# Altium PCB BBB_Board_NEW_PLANES.PcbDoc (part 4 of 4)
Units mil, origin at the board's own origin, x right, y up, seen from the top; angles counter-clockwise.
Board outline 11000 x 5000 mil, 2 copper layers (Top Layer, Bottom Layer); 103 components, 383 nets, 1066 pads, 514 vias.
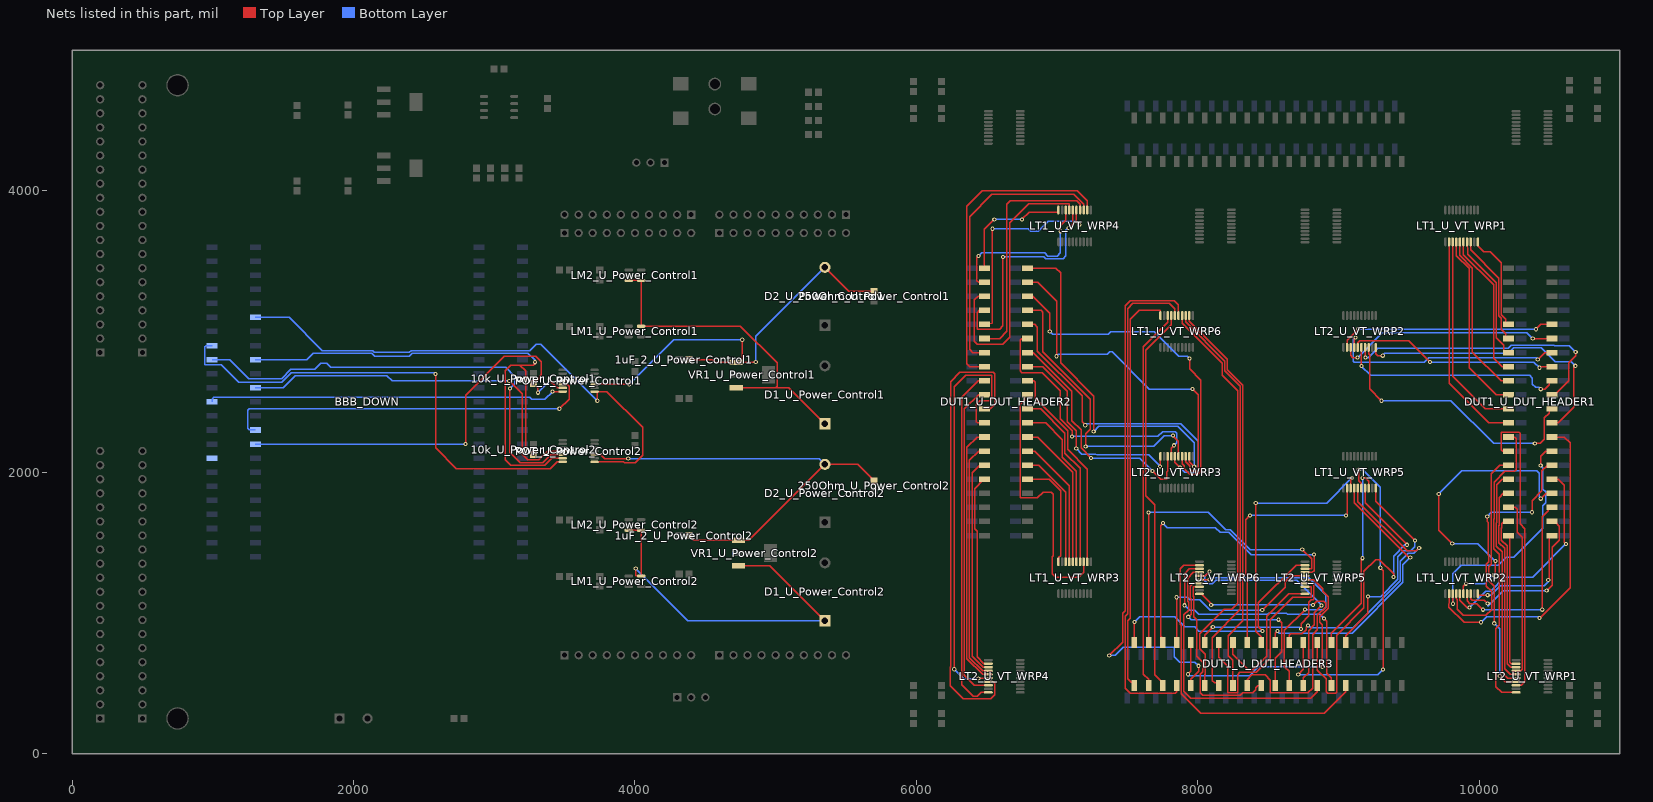
[diagram p4: the nets of this part, all layers, seen from the top]

## Via types
v1: diameter 30, hole 15, Top Layer to Bottom Layer, 514 vias

## Nets (pads, with @x,y where several pads share a name; then routed paths per layer and width w, separated by ;. In a path a pad name is that pad's centre, name@x,y a point inside that pad or via, vN(x,y) a via of type N, cw(c..) or ccw(c..) an arc to the next point about the centre after c; other vN are vias at no path point) (continued)
OVCC_B32: DUT1_U_DUT_HEADER3.1 LT1_U_VT_WRP6.20 | length 2921.8
  Top Layer w10: DUT1_U_DUT_HEADER3.1@7550,483.96 7550,504 7530,504 7503,531 7503,945 7520,962 7520,3087 7585,3152 7734.84,3152 LT1_U_VT_WRP6.20@7734.84,3113.19
OVCC_B33: DUT1_U_DUT_HEADER3.2 LT1_U_VT_WRP6.18 | length 2716.2
  Top Layer w10: DUT1_U_DUT_HEADER3.2@7650,483.96 7650,528 7613,565 7613,2893.06 7786.02,3066.09 LT1_U_VT_WRP6.18@7786.02,3113.19
OVCC_B34: DUT1_U_DUT_HEADER3.3 LT1_U_VT_WRP6.17 | length 2753.3
  Top Layer w10: DUT1_U_DUT_HEADER3.3@7750,483.96 7750,504 7694,560 7694,1768 7631,1831 7631,2867 7811.61,3047.61 LT1_U_VT_WRP6.17@7811.61,3113.19
OVCC_B35: DUT1_U_DUT_HEADER3.4 LT1_U_VT_WRP6.16 | length 3544.5
  Top Layer w10: LT1_U_VT_WRP6.16@7837.2,3113.19 7837.2,3160 7798.2,3199 7538,3199 7502,3163 7502,995 7485,978 7485,466 7521,430 7839,430 7850,441 DUT1_U_DUT_HEADER3.4@7850,483.96
OVCC_B36: DUT1_U_DUT_HEADER3.5 LT1_U_VT_WRP6.15 | length 3927.4
  Top Layer w10: v1(7371,698) 7465,792 7465,998 7484,1017 7484,3183 7520,3219 7833,3219 7862.8,3189.2 LT1_U_VT_WRP6.15@7862.8,3113.19 ; DUT1_U_DUT_HEADER3.5@7950,483.96 7950,529 8005,584 v1(8005,624)
  Bottom Layer w10: v1(7371,698) 7413.12,698 7471.04,755.92 7830,755.92 7834,751.92 7834,687 7870,651 7978,651 v1(8005,624)
OVCC_B37: DUT1_U_DUT_HEADER3.6 LT1_U_VT_WRP6.14 | length 2952.6
  Top Layer w10: LT1_U_VT_WRP6.14@7888.39,3113.19 7888.39,3059 8172.14,2775.25 8172.14,2690.14 8285,2577.27 8285,1070 8240,1025 8187,1025 8015,853 8015,743.99 8052,706.99 8052,563.17 8050,561.17 DUT1_U_DUT_HEADER3.6@8050,483.96
OVCC_B38: DUT1_U_DUT_HEADER3.7 LT1_U_VT_WRP6.13 | length 2910
  Top Layer w10: LT1_U_VT_WRP6.13@7913.98,3113.19 7913.98,3068.42 8193,2789.39 8193,2721 8303,2611 8303,1024.5 8103,824.5 8103,519.5 8120.5,502 8150,502 DUT1_U_DUT_HEADER3.7@8150,483.96
OVCC_B39: DUT1_U_DUT_HEADER3.8 LT1_U_VT_WRP6.12 | length 2844.8
  Top Layer w10: LT1_U_VT_WRP6.12@7939.57,3113.19 7939.57,3073 8211,2801.57 8211,2729 8321,2619 8321,944 8216,839 8216,696 8250,662 DUT1_U_DUT_HEADER3.8@8250,483.96
OVCC_B40: DUT1_U_DUT_HEADER3.9 LT2_U_VT_WRP6.20 | length 2231.3
  Top Layer w10: LT2_U_VT_WRP6.20@8011.81,1134.84 8024.16,1134.84 8095,1064 v1(8095,1057) ; DUT1_U_DUT_HEADER3.9@8350,483.96 8350,526 8383,559 8478,559 8516,521 8516,432.58 8517,431.58 8783,431.58 8816,464.58 8816,846.51 8850,880.51 8850,982 8908,1040 8908,1070 8896,1082 8844,1082 v1(8819,1057)
  Bottom Layer w10: v1(8095,1057) v1(8819,1057)
OVCC_B41: DUT1_U_DUT_HEADER3.10 LT2_U_VT_WRP6.18 | length 1312.3
  Top Layer w10: LT2_U_VT_WRP6.18@8011.81,1186.02 7969,1186.02 7967,1184.02 7967,1118 7970,1115 7970,974 7994,950 7994,691 8034,651 8034,581.17 8016,563.17 8016,432.58 8035,413.58 8300.69,413.58 8318.69,431.58 8389,431.58 8412,454.58 8412,470 8425.96,483.96 DUT1_U_DUT_HEADER3.10@8450,483.96
OVCC_B42: DUT1_U_DUT_HEADER3.11 LT2_U_VT_WRP6.17 | length 1447.8
  Top Layer w10: v1(7932,972) 7952,992 7952,1100 7946.98,1105.02 7946.98,1189.98 7968.61,1211.61 LT2_U_VT_WRP6.17@8011.81,1211.61 ; DUT1_U_DUT_HEADER3.11@8550,483.96 8550,678 8595,723 8595,931 v1(8574,952)
  Bottom Layer w10: v1(7932,972) 7952,952 v1(8574,952)
OVCC_B43: DUT1_U_DUT_HEADER3.12 LT2_U_VT_WRP6.16 | length 1809.1
  Top Layer w10: LT2_U_VT_WRP6.16@8011.81,1237.2 8083.8,1237.2 v1(8084,1237) ; DUT1_U_DUT_HEADER3.12@8650,483.96 8650,585 8616,619 8616,878 v1(8762,1024)
  Bottom Layer w10: v1(8084,1237) 8095.88,1248.88 8790.12,1248.88 8909,1130 8909,1041 8892,1024 v1(8762,1024)
OVCC_B44: DUT1_U_DUT_HEADER3.13 LT2_U_VT_WRP6.15 | length 1709.5
  Top Layer w10: LT2_U_VT_WRP6.15@8011.81,1262.8 8052.8,1262.8 v1(8084,1294) ; DUT1_U_DUT_HEADER3.13@8750,483.96 8750,538 8787,575 8787,873.86 8829.27,916.13 8829.27,1002.27 v1(8880,1053)
  Bottom Layer w10: v1(8084,1294) 8050,1260 8050,1227.5 8069.07,1208.43 8103.93,1208.43 8126.38,1230.88 8702.12,1230.88 v1(8880,1053)
OVCC_B45: DUT1_U_DUT_HEADER3.14 LT2_U_VT_WRP6.14 | length 1952
  Top Layer w10: LT2_U_VT_WRP6.14@8011.81,1288.39 7969.39,1288.39 7928,1247 7928,1082.98 7934,1076.98 7934,1020.32 7901,987.32 7901,443 7949,395 8804,395 8850,441 DUT1_U_DUT_HEADER3.14@8850,483.96
OVCC_B46: DUT1_U_DUT_HEADER3.15 LT2_U_VT_WRP6.13 | length 1882.1
  Top Layer w10: v1(7906,1054) 7906,1280 7939.98,1313.98 LT2_U_VT_WRP6.13@8011.81,1313.98 ; v1(8897,960) 8916,941 8916,573 8950,539 DUT1_U_DUT_HEADER3.15@8950,483.96
  Bottom Layer w10: v1(7906,1054) 7941,1019 7977,1019 8007,989 8493,989 8503,999 8629.5,999 8638.5,990 8867,990 v1(8897,960)
OVCC_B47: DUT1_U_DUT_HEADER3.16 LT2_U_VT_WRP6.12 | length 2368.7
  Top Layer w10: LT2_U_VT_WRP6.12@8011.81,1339.57 7899.94,1339.57 7876,1315.63 7876,919 7883,912 7883,427 8022,288 8898,288 9050,440 DUT1_U_DUT_HEADER3.16@9050,483.96
OVCC_B48: DUT1_U_DUT_HEADER3.25 LT1_U_VT_WRP5.20 | length 1496.2
  Top Layer w10: DUT1_U_DUT_HEADER3.25@9050,791.04 9050,837.59 9209,996.59 v1(9209,1116) ; LT1_U_VT_WRP5.20@9265.16,1886.81 9265.16,1792.78 v1(9542.88,1515.05)
  Bottom Layer w10: v1(9209,1116) 9299,1116 9422,1239 9422,1398.61 9464.39,1441 9513.06,1441 9542.88,1470.82 v1(9542.88,1515.05)
OVCC_B49: DUT1_U_DUT_HEADER3.26 LT1_U_VT_WRP5.18 | length 1361.2
  Top Layer w10: DUT1_U_DUT_HEADER3.26@8950,791.04 8950,855 9162,1067 9162,1380 v1(9171,1389) ; v1(9171,1959) 9191,1959 9213.98,1936.02 LT1_U_VT_WRP5.18@9213.98,1886.81
  Bottom Layer w10: v1(9171,1389) v1(9171,1959)
OVCC_B50: DUT1_U_DUT_HEADER3.27 LT1_U_VT_WRP5.17 | length 2507.6
  Top Layer w10: DUT1_U_DUT_HEADER3.27@8850,791.04 8850,594 8913,531 8913,440 8923,430 8980.54,430 8986,435.46 8986,843 9180,1037 9180,1294.46 9263.32,1377.77 9289.89,1377.77 9391,1276.67 v1(9391,1256) ; LT1_U_VT_WRP5.17@9188.39,1886.81 9188.39,1782.61 v1(9487,1484)
  Bottom Layer w10: v1(9391,1256) 9391,1403.97 9471.03,1484 v1(9487,1484)
OVCC_B51: DUT1_U_DUT_HEADER3.28 LT1_U_VT_WRP5.16 | length 2511.9
  Top Layer w10: v1(8714,562) 8750,598 DUT1_U_DUT_HEADER3.28@8750,791.04 ; v1(9143,2019) 9143,1939.8 9162.8,1920 LT1_U_VT_WRP5.16@9162.8,1886.81 ; v1(9297,1321) 9317,1301 v1(9317,598.65)
  Bottom Layer w10: v1(8714,562) 9280.35,562 v1(9317,598.65) ; v1(9143,2019) 9172,2019 9297,1894 v1(9297,1321)
OVCC_B52: DUT1_U_DUT_HEADER3.29 LT1_U_VT_WRP5.15 | length 2020.1
  Top Layer w10: DUT1_U_DUT_HEADER3.29@8650,791.04 8650,841 8660,851 8740,851 8769,880 8769,897 v1(8783,911) ; LT1_U_VT_WRP5.15@9137.2,1886.81 9137.2,1791.43 9487.14,1441.5 9553,1441.5 v1(9573,1461.5)
  Bottom Layer w10: v1(8783,911) 8801,893 9103,893 9440,1230 9440,1368.03 9494.56,1422.59 9534.09,1422.59 v1(9573,1461.5)
OVCC_B53: DUT1_U_DUT_HEADER3.30 LT1_U_VT_WRP5.14 | length 1994
  Top Layer w10: DUT1_U_DUT_HEADER3.30@8550,791.04 8550,855 v1(8566,871) ; LT1_U_VT_WRP5.14@9111.61,1886.81 9111.61,1783.64 9500.67,1394.59 v1(9509.97,1394.59)
  Bottom Layer w10: v1(8566,871) 8580,857 9095.85,857 9458,1219.15 9458,1342.61 v1(9509.97,1394.59)
OVCC_B54: DUT1_U_DUT_HEADER3.31 LT1_U_VT_WRP5.13 | length 1838.3
  Top Layer w10: v1(8412,1781) 8412,870 8450,832 DUT1_U_DUT_HEADER3.31@8450,791.04 ; LT1_U_VT_WRP5.13@9086.02,1886.81 9086.02,1950.02 v1(9095,1959)
  Bottom Layer w10: v1(8412,1781) 8917,1781 v1(9095,1959)
OVCC_B55: DUT1_U_DUT_HEADER3.32 LT1_U_VT_WRP5.12 | length 1799.2
  Top Layer w10: DUT1_U_DUT_HEADER3.32@8350,791.04 8350,1267.75 8339,1278.75 8339,1662 v1(8370,1693) ; v1(9053,1693) 9060.43,1700.43 LT1_U_VT_WRP5.12@9060.43,1886.81
  Bottom Layer w10: v1(8370,1693) v1(9053,1693)
OVCC_B56: DUT1_U_DUT_HEADER3.33 LT2_U_VT_WRP5.20 | length 1031.3
  Top Layer w10: DUT1_U_DUT_HEADER3.33@8250,791.04 8250,706 8360,596 8392,596 8489,693 8489,975.84 8648,1134.84 LT2_U_VT_WRP5.20@8761.81,1134.84
OVCC_B57: DUT1_U_DUT_HEADER3.34 LT2_U_VT_WRP5.18 | length 1615.3
  Top Layer w10: DUT1_U_DUT_HEADER3.34@8150,791.04 8150,686.31 8213.68,622.63 8213.68,431.58 8282.69,431.58 8283,431.9 8283,560.31 8299.69,577 8413.96,577 8516,679.04 8516,952 8676,1112 8807,1112 8807,1186.02 LT2_U_VT_WRP5.18@8761.81,1186.02
OVCC_B58: DUT1_U_DUT_HEADER3.35 LT2_U_VT_WRP5.17 | length 1195.5
  Top Layer w10: DUT1_U_DUT_HEADER3.35@8050,791.04 8050,842 v1(8107,899) ; v1(8734,886) 8734,922.51 8790,978.51 8790,1077.54 8804.81,1092.35 8825,1092.35 8825,1200 8813.39,1211.61 LT2_U_VT_WRP5.17@8761.81,1211.61
  Bottom Layer w10: v1(8107,899) 8721,899 v1(8734,886)
OVCC_B59: DUT1_U_DUT_HEADER3.36 LT2_U_VT_WRP5.16 | length 1976.5
  Top Layer w10: v1(7930,564) 7950,584 DUT1_U_DUT_HEADER3.36@7950,791.04 ; LT2_U_VT_WRP5.16@8761.81,1237.2 8823.33,1237.2 8888.69,1171.85 8888.69,1154.57 8927,1116.26 8927,1033.54 8868,974.54 8868,933 8885,916 v1(8885,616)
  Bottom Layer w10: v1(7930,564) 7939,555 8368,555 8429,616 v1(8885,616)
OVCC_B60: DUT1_U_DUT_HEADER3.37 LT2_U_VT_WRP5.15 | length 1394.7
  Top Layer w10: v1(7848,1111) 7850,1109 DUT1_U_DUT_HEADER3.37@7850,791.04 ; v1(8458,1020) 8620.76,1182.76 8620.76,1220 8663.56,1262.8 LT2_U_VT_WRP5.15@8761.81,1262.8
  Bottom Layer w10: v1(7848,1111) 7925.46,1111 7942.46,1094 8013,1094 8087,1020 v1(8458,1020)
OVCC_B61: DUT1_U_DUT_HEADER3.38 LT2_U_VT_WRP5.14 | length 2209.4
  Top Layer w10: DUT1_U_DUT_HEADER3.38@7750,791.04 7750,820.27 7735,835.27 7735,1621 v1(7752,1638) ; LT2_U_VT_WRP5.14@8761.81,1288.39 8813.39,1288.39 8826,1301 8826,1414 v1(8825,1415)
  Bottom Layer w10: v1(7752,1638) 7783,1607 8125,1607 8158.98,1573.02 8220.98,1573.02 8379,1415 v1(8825,1415)
OVCC_B62: DUT1_U_DUT_HEADER3.39 LT2_U_VT_WRP5.13 | length 2333.8
  Top Layer w10: DUT1_U_DUT_HEADER3.39@7650,791.04 v1(7650,1714.4) ; v1(8742,1450) 8808,1384 8808,1314.98 8807,1313.98 LT2_U_VT_WRP5.13@8761.81,1313.98
  Bottom Layer w10: v1(7650,1714.4) 8074.91,1714.4 8197.31,1592 8231,1592 8373,1450 v1(8742,1450)
OVCC_B63: DUT1_U_DUT_HEADER3.40 LT2_U_VT_WRP5.12 | length 1766.9
  Top Layer w10: DUT1_U_DUT_HEADER3.40@7550,791.04 v1(7550,935) ; v1(8460,871) 8430,901 8430,1071.46 8698.1,1339.57 LT2_U_VT_WRP5.12@8761.81,1339.57
  Bottom Layer w10: v1(7550,935) 7587,972 7835.98,972 7906.98,901 7977.22,901 8007.22,871 v1(8460,871)
OVCC_B64: DUT1_U_DUT_HEADER2.1 LT1_U_VT_WRP4.20 | length 868.9
  Top Layer w10: DUT1_U_DUT_HEADER2.1@6483.96,3450 6483,3450 6483,3725 v1(6554,3796) ; v1(6750,3796) 6802,3848 7009.84,3848 LT1_U_VT_WRP4.20@7009.84,3863.19
  Bottom Layer w10: v1(6554,3796) v1(6750,3796)
OVCC_B65: DUT1_U_DUT_HEADER2.2 LT1_U_VT_WRP4.18 | length 1166.8
  Top Layer w10: v1(6442,3536) 6430,3524 6430,3361.58 6441.58,3350 DUT1_U_DUT_HEADER2.2@6483.96,3350 ; v1(7024,3713) 7024,3753 7061.02,3790.02 LT1_U_VT_WRP4.18@7061.02,3863.19
  Bottom Layer w10: v1(6442,3536) 6464,3558 6912.94,3558 6934.94,3536 7000,3536 7024,3560 v1(7024,3713)
OVCC_B66: DUT1_U_DUT_HEADER2.3 LT1_U_VT_WRP4.17 | length 1994.3
  Top Layer w10: DUT1_U_DUT_HEADER2.3@6483.96,3250 6439,3250 6413,3224 6413,2929 6434,2908 6613,2908 6665,2960 6665,3773 6800,3908 7086.61,3908 LT1_U_VT_WRP4.17@7086.61,3863.19
OVCC_B67: DUT1_U_DUT_HEADER2.4 LT1_U_VT_WRP4.16 | length 1670.6
  Top Layer w10: DUT1_U_DUT_HEADER2.4@6483.96,3150 6448,3150 6431,3133 6431,3017.58 6432.58,3016 6591,3016 6615,3040 v1(6615,3530) ; v1(7083,3736) 7112.2,3765.2 LT1_U_VT_WRP4.16@7112.2,3863.19
  Bottom Layer w10: v1(6615,3530) 6907,3530 6920,3517 7043,3517 7063,3537 7063,3720 7079,3736 v1(7083,3736)
OVCC_B68: DUT1_U_DUT_HEADER2.5 LT1_U_VT_WRP4.15 | length 1504.8
  Top Layer w10: DUT1_U_DUT_HEADER2.5@6483.96,3050 6541,3060 v1(6541,3730) ; LT1_U_VT_WRP4.15@7137.8,3863.19 7137.8,3779 v1(7157.8,3759)
  Bottom Layer w10: v1(6541,3730) 6794,3730 6813,3711 6867,3711 6939,3783 7133.8,3783 v1(7157.8,3759)
OVCC_B69: DUT1_U_DUT_HEADER2.6 LT1_U_VT_WRP4.14 | length 1664
  Top Layer w10: DUT1_U_DUT_HEADER2.6@6483.96,2950 6593,2950 6643,3000 6643,3904 6667,3928 7138,3928 7163.39,3902.61 LT1_U_VT_WRP4.14@7163.39,3863.19
OVCC_B70: DUT1_U_DUT_HEADER2.7 LT1_U_VT_WRP4.13 | length 2004.7
  Top Layer w10: DUT1_U_DUT_HEADER2.7@6483.96,2850 6402,2850 6379,2873 6379,3817 6537,3975 7118.98,3975 7188.98,3905 LT1_U_VT_WRP4.13@7188.98,3863.19
OVCC_B71: DUT1_U_DUT_HEADER2.8 LT1_U_VT_WRP4.12 | length 2249.3
  Top Layer w10: DUT1_U_DUT_HEADER2.8@6483.96,2750 6380,2750 6359,2771 6359,3891 6468,4000 7143,4000 7214.57,3928.43 LT1_U_VT_WRP4.12@7214.57,3863.19
OVCC_B72: DUT1_U_DUT_HEADER2.9 LT2_U_VT_WRP4.20 | length 2485
  Top Layer w10: DUT1_U_DUT_HEADER2.9@6483.96,2650 6441,2650 6323.58,2532.58 6323.58,488.42 6403,409 6434.16,409 6460,434.84 LT2_U_VT_WRP4.20@6511.81,434.84
OVCC_B73: DUT1_U_DUT_HEADER2.10 LT2_U_VT_WRP4.18 | length 2276.7
  Top Layer w10: DUT1_U_DUT_HEADER2.10@6483.96,2550 6441.58,2550 6341.58,2450 6341.58,556.44 6412,486.02 LT2_U_VT_WRP4.18@6511.81,486.02
OVCC_B74: DUT1_U_DUT_HEADER2.11 LT2_U_VT_WRP4.17 | length 3309.1
  Top Layer w10: DUT1_U_DUT_HEADER2.11@6483.96,2450 6525,2450 6556,2481 6556,2699 6545,2710 6310,2710 6244,2644 6244,616 6241,613 6241,481 6332,390 6528,390 6558,420 6558,500 6546.39,511.61 LT2_U_VT_WRP4.17@6511.81,511.61
OVCC_B75: DUT1_U_DUT_HEADER2.12 LT2_U_VT_WRP4.16 | length 3060.5
  Top Layer w10: v1(6269,600) 6269,2607 6350,2688 6537,2688 6537,2520 6523,2506 6451,2506 6425,2480 6425,2360 6435,2350 DUT1_U_DUT_HEADER2.12@6483.96,2350 ; v1(6440,533) 6444.2,537.2 LT2_U_VT_WRP4.16@6511.81,537.2
  Bottom Layer w10: v1(6269,600) 6336,533 v1(6440,533)
OVCC_B76: DUT1_U_DUT_HEADER2.13 LT2_U_VT_WRP4.15 | length 1856.3
  Top Layer w10: DUT1_U_DUT_HEADER2.13@6483.96,2250 6431,2250 6359.58,2178.58 6359.58,674.96 6471.75,562.8 LT2_U_VT_WRP4.15@6511.81,562.8
OVCC_B77: DUT1_U_DUT_HEADER2.14 LT2_U_VT_WRP4.14 | length 1709.6
  Top Layer w10: DUT1_U_DUT_HEADER2.14@6483.96,2150 6441.58,2150 6377.58,2086 6377.58,682.42 6471.61,588.39 LT2_U_VT_WRP4.14@6511.81,588.39
OVCC_B78: DUT1_U_DUT_HEADER2.15 LT2_U_VT_WRP4.13 | length 1562.5
  Top Layer w10: DUT1_U_DUT_HEADER2.15@6483.96,2050 6449.58,2050 6395.58,1996 6395.58,693.42 6475.02,613.98 LT2_U_VT_WRP4.13@6511.81,613.98
OVCC_B79: DUT1_U_DUT_HEADER2.16 LT2_U_VT_WRP4.12 | length 1401.6
  Top Layer w10: DUT1_U_DUT_HEADER2.16@6483.96,1950 6480,1950 6413.58,1883.58 6413.58,1599.31 6431,1581.9 6431,688 6479.43,639.57 LT2_U_VT_WRP4.12@6511.81,639.57
OVCC_B80: DUT1_U_DUT_HEADER2.25 LT1_U_VT_WRP3.20 | length 778.9
  Top Layer w10: DUT1_U_DUT_HEADER2.25@6791.04,1950 6942.9,1950 7025,1867.9 7025,1406.31 7013.58,1394.88 7013.58,1366.92 LT1_U_VT_WRP3.20@7009.84,1363.19
OVCC_B81: DUT1_U_DUT_HEADER2.26 LT1_U_VT_WRP3.18 | length 844.3
  Top Layer w10: DUT1_U_DUT_HEADER2.26@6791.04,2050 6869,2050 7061.02,1857.98 LT1_U_VT_WRP3.18@7061.02,1363.19
OVCC_B82: DUT1_U_DUT_HEADER2.27 LT1_U_VT_WRP3.17 | length 937.9
  Top Layer w10: DUT1_U_DUT_HEADER2.27@6791.04,2150 6840,2150 7086.61,1903.39 LT1_U_VT_WRP3.17@7086.61,1363.19
OVCC_B83: DUT1_U_DUT_HEADER2.28 LT1_U_VT_WRP3.16 | length 1062
  Top Layer w10: DUT1_U_DUT_HEADER2.28@6791.04,2250 6863,2250 7112.2,2000.8 LT1_U_VT_WRP3.16@7112.2,1363.19
OVCC_B84: DUT1_U_DUT_HEADER2.29 LT1_U_VT_WRP3.15 | length 1204.8
  Top Layer w10: DUT1_U_DUT_HEADER2.29@6791.04,2350 6918,2350 7037,2231 7037,2106.54 7137.8,2005.75 LT1_U_VT_WRP3.15@7137.8,1363.19
OVCC_B85: DUT1_U_DUT_HEADER2.30 LT1_U_VT_WRP3.14 | length 1295.5
  Top Layer w10: DUT1_U_DUT_HEADER2.30@6791.04,2450 6884,2450 7055.77,2278.23 7055.77,2136.2 7163.39,2028.59 LT1_U_VT_WRP3.14@7163.39,1363.19
OVCC_B86: DUT1_U_DUT_HEADER2.31 LT1_U_VT_WRP3.13 | length 1911.8
  Top Layer w10: DUT1_U_DUT_HEADER2.31@6791.04,2550 6771,2550 6771,2515.33 6738,2482.33 6738,1817.99 6738.99,1817 6860,1817 6900,1857 6959,1857 6974,1842 6974,1406.35 6967,1399.35 6967,1278 6991,1254 7152.98,1254 7188.98,1290 LT1_U_VT_WRP3.13@7188.98,1363.19
OVCC_B87: DUT1_U_DUT_HEADER2.32 LT1_U_VT_WRP3.12 | length 1487.4
  Top Layer w10: DUT1_U_DUT_HEADER2.32@6791.04,2650 6834,2650 6843.42,2640.58 6843.42,2526.58 7075,2295 7075,2161.44 7214.57,2021.87 LT1_U_VT_WRP3.12@7214.57,1363.19
OVCC_B88: DUT1_U_DUT_HEADER2.33 LT2_U_VT_WRP3.20 | length 1509
  Top Layer w10: DUT1_U_DUT_HEADER2.33@6791.04,2750 6898.2,2750 7072.96,2575.24 7072.96,2359.35 7136,2296.31 v1(7136,2169) ; v1(7732,2041) 7734.84,2043.84 LT2_U_VT_WRP3.20@7734.84,2113.19
  Bottom Layer w10: v1(7136,2169) 7176,2129 7274.59,2129 7280.59,2123 7650,2123 v1(7732,2041)
OVCC_B89: DUT1_U_DUT_HEADER2.34 LT2_U_VT_WRP3.18 | length 1724.6
  Top Layer w10: DUT1_U_DUT_HEADER2.34@6791.04,2850 6832,2850 7106,2576 7106,2367 7170,2303 7170,2172 v1(7242,2100) ; v1(7677,2009) 7735,1951 7779,1951 7780,1952 7780,2001.98 7786.02,2008 LT2_U_VT_WRP3.18@7786.02,2113.19
  Bottom Layer w10: v1(7242,2100) 7586,2100 v1(7677,2009)
OVCC_B90: DUT1_U_DUT_HEADER2.35 LT2_U_VT_WRP3.17 | length 1924.1
  Top Layer w10: DUT1_U_DUT_HEADER2.35@6791.04,2950 6748.67,2950 6738,2939.33 6738,2719.33 6750,2707.33 6894.67,2707.33 7022,2580 7022,2379 7107,2294 v1(7107,2254) ; LT2_U_VT_WRP3.17@7811.61,2113.19 7811.61,2171.61 v1(7831,2191)
  Bottom Layer w10: v1(7107,2254) 7716,2254 7751,2289 7839.2,2289 7851,2277.2 7851,2211 v1(7831,2191)
OVCC_B91: DUT1_U_DUT_HEADER2.36 LT2_U_VT_WRP3.16 | length 2219
  Top Layer w10: DUT1_U_DUT_HEADER2.36@6791.04,3050 6840,3050 6860,3030 6860,2860 7177.24,2542.76 7177.24,2356.76 v1(7200,2334) ; LT2_U_VT_WRP3.16@7837.2,2113.19 7837.2,2070.04 v1(7873.2,2034.04)
  Bottom Layer w10: v1(7200,2334) 7210,2344 7878.85,2344 8003,2219.85 8003,2021 7981,1999 7908.24,1999 v1(7873.2,2034.04)
OVCC_B92: DUT1_U_DUT_HEADER2.37 LT2_U_VT_WRP3.15 | length 2034.9
  Top Layer w10: DUT1_U_DUT_HEADER2.37@6791.04,3150 6886.1,3150 6899,3137.1 6899,2855 7235,2519 7235,2306 7203,2274 v1(7203,2183) ; v1(7822.8,2260) 7862.8,2220 LT2_U_VT_WRP3.15@7862.8,2113.19
  Bottom Layer w10: v1(7203,2183) 7685.8,2183 7762.8,2260 v1(7822.8,2260)
OVCC_B93: DUT1_U_DUT_HEADER2.38 LT2_U_VT_WRP3.14 | length 2498.5
  Top Layer w10: DUT1_U_DUT_HEADER2.38@6791.04,3250 6827,3250 6948,3129 v1(6948,2999) ; LT2_U_VT_WRP3.14@7888.39,2113.19 7888.39,2060.82 7903.2,2046 7903.2,2025.18 7944.39,1984 8000,1984 8021,2005 8021,2654 7941,2734 v1(7941,2807.57)
  Bottom Layer w10: v1(6948,2999) 6968,2979 7363,2979 7382,2998 7689,2998 7863,2824 7924.57,2824 v1(7941,2807.57)
OVCC_B94: DUT1_U_DUT_HEADER2.39 LT2_U_VT_WRP3.13 | length 2502.3
  Top Layer w10: DUT1_U_DUT_HEADER2.39@6791.04,3350 6861,3350 6996,3215 v1(6996,2824) ; LT2_U_VT_WRP3.13@7913.98,2113.19 7913.98,2073.67 7942.07,2045.57 7942.07,2024.93 7960,2007 7990,2007 8002,2019 8002,2552 v1(7963,2591)
  Bottom Layer w10: v1(6996,2824) 7010,2838 7358,2838 7376,2856 7391.12,2856 7656.12,2591 v1(7963,2591)
OVCC_B95: DUT1_U_DUT_HEADER2.40 LT2_U_VT_WRP3.12 | length 2508.7
  Top Layer w10: DUT1_U_DUT_HEADER2.40@6791.04,3450 6992,3450 7025,3417 7025,2776 7260,2541 v1(7260,2288.49) ; LT2_U_VT_WRP3.12@7939.57,2113.19 7939.57,2074.43 v1(7974,2040)
  Bottom Layer w10: v1(7260,2288.49) 7297.51,2326 7858.33,2326 7974,2210.33 v1(7974,2040)
OVCC_B96: DUT1_U_DUT_HEADER1.1 LT1_U_VT_WRP2.20 | length 900.4
  Top Layer w10: LT1_U_VT_WRP2.20@9990.16,1136.81 9990.16,1126 v1(10060,1126) ; v1(10490,1234) 10497,1241 10497,1550 DUT1_U_DUT_HEADER1.1@10516.04,1550
  Bottom Layer w10: v1(10060,1126) 10080,1126 10148,1194 10462,1194 10490,1222 v1(10490,1234)
OVCC_B97: DUT1_U_DUT_HEADER1.2 LT1_U_VT_WRP2.18 | length 1217.7
  Top Layer w10: LT1_U_VT_WRP2.18@9938.98,1136.81 9938.98,1101.1 9950,1090.07 10036.93,1090.07 v1(10060,1067) ; v1(10479,1159) 10518,1198 10518,1466.9 10568.42,1517.31 10568.42,1617.58 10536,1650 DUT1_U_DUT_HEADER1.2@10516.04,1650
  Bottom Layer w10: v1(10060,1067) 10060,1047 10172,1159 v1(10479,1159)
OVCC_B98: DUT1_U_DUT_HEADER1.3 LT1_U_VT_WRP2.17 | length 1381.4
  Top Layer w10: LT1_U_VT_WRP2.17@9913.39,1136.81 9913.39,1086 9933.39,1066 9983,1066 v1(10026,1023) ; v1(10448,1023) 10448,1683 10491,1726 10491,1750 DUT1_U_DUT_HEADER1.3@10516.04,1750
  Bottom Layer w10: v1(10026,1023) v1(10448,1023)
OVCC_B99: DUT1_U_DUT_HEADER1.4 LT1_U_VT_WRP2.16 | length 2223.8
  Top Layer w10: v1(9712,1846) 9712,1589 v1(9808,1493) ; LT1_U_VT_WRP2.16@9887.8,1136.81 9887.8,1189.8 v1(9906,1208) ; v1(10102,1270) 10115,1283 v1(10115,1368) ; v1(10437,1812) 10475,1850 DUT1_U_DUT_HEADER1.4@10516.04,1850
  Bottom Layer w10: v1(9712,1846) 9875,2009 10410,2009 10425,1994 10425,1824 v1(10437,1812) ; v1(9808,1493) 9990,1493 v1(10115,1368) ; v1(9906,1208) 10040,1208 v1(10102,1270)
OVCC_B100: DUT1_U_DUT_HEADER1.5 LT1_U_VT_WRP2.15 | length 1536.1
  Top Layer w10: LT1_U_VT_WRP2.15@9862.2,1136.81 9862.2,1090.8 9915,1038 v1(9930,1038) ; DUT1_U_DUT_HEADER1.5@10516.04,1950 10560,1950 10604.42,1905.58 10604.42,1501.58 v1(10616,1490)
  Bottom Layer w10: v1(9930,1038) 10047,1155 10080.53,1155 10178.88,1253.35 10379.35,1253.35 v1(10616,1490)
OVCC_B101: DUT1_U_DUT_HEADER1.6 LT1_U_VT_WRP2.14 | length 1825.5
  Top Layer w10: LT1_U_VT_WRP2.14@9836.61,1136.81 9836.61,1102.27 9842,1096.88 9842,1025.62 9885.62,982 10047,982 10088,1023 10088,1154 10051,1191 10051,1345.23 10069,1363.23 10069,1405 10063,1411 10063,1643 10057,1649 v1(10057,1685) ; v1(10375,1715) 10375,1797 10445,1867 10445,2008.62 10486.38,2050 DUT1_U_DUT_HEADER1.6@10516.04,2050
  Bottom Layer w10: v1(10057,1685) 10087,1715 v1(10375,1715)
OVCC_B102: DUT1_U_DUT_HEADER1.7 LT1_U_VT_WRP2.13 | length 1691.4
  Top Layer w10: LT1_U_VT_WRP2.13@9811.02,1136.81 9811.02,1066.98 v1(9813,1065) ; v1(10436.5,2047.5) 10436.5,2113.5 10473,2150 DUT1_U_DUT_HEADER1.7@10516.04,2150
  Bottom Layer w10: v1(9813,1065) 9813,1280 9872,1339 10135.49,1339 10191.37,1394.87 10246.87,1394.87 10452,1600 10452,1763.31 10473.32,1784.63 10473.32,1859.67 10452.87,1880.12 10452.87,2031.13 v1(10436.5,2047.5)
OVCC_B103: DUT1_U_DUT_HEADER1.8 LT1_U_VT_WRP2.12 | length 2287.9
  Top Layer w10: LT1_U_VT_WRP2.12@9785.43,1136.81 9785.43,1093.32 9784,1041.67 9891.67,934 v1(10013,934) ; v1(10429,963) 10645,1179 10645,2210 10605,2250 DUT1_U_DUT_HEADER1.8@10516.04,2250
  Bottom Layer w10: v1(10013,934) 10053,974 10418,974 v1(10429,963)
OVCC_B104: DUT1_U_DUT_HEADER1.9 LT2_U_VT_WRP2.20 | length 2045.7
  Top Layer w10: LT2_U_VT_WRP2.20@9265.16,2886.81 9265.16,2840 9277.16,2828 v1(9314,2828) ; DUT1_U_DUT_HEADER1.9@10516.04,2350 10560,2350 10673,2463 10673,2746 v1(10683,2756)
  Bottom Layer w10: v1(9314,2828) 9330,2844 10205.4,2844 10244.08,2882.69 10441.31,2882.69 10540,2784 10655,2784 v1(10683,2756)
OVCC_B105: DUT1_U_DUT_HEADER1.10 LT2_U_VT_WRP2.18 | length 1962.7
  Top Layer w10: LT2_U_VT_WRP2.18@9213.98,2886.81 9213.98,2840 9221,2832.98 9221,2591.57 v1(9304.57,2508) ; v1(10395,2204) 10432.77,2204 10463,2234.23 10463,2385.33 10496,2418.33 10496,2450 DUT1_U_DUT_HEADER1.10@10516.04,2450
  Bottom Layer w10: v1(9304.57,2508) 9798,2508 10102,2204 v1(10395,2204)
OVCC_B106: DUT1_U_DUT_HEADER1.11 LT2_U_VT_WRP2.17 | length 2007.6
  Top Layer w10: LT2_U_VT_WRP2.17@9188.39,2886.81 9188.39,2817.61 v1(9191,2815) ; DUT1_U_DUT_HEADER1.11@10516.04,2550 10536,2550 10636,2650 10636,2779.22 10685.22,2828.45 v1(10685.22,2853.78)
  Bottom Layer w10: v1(9191,2815) 9211,2815 9278,2882 10207.4,2882 10226.08,2900.69 10531.8,2900.69 10533.49,2899 10640,2899 v1(10685.22,2853.78)
OVCC_B107: DUT1_U_DUT_HEADER1.12 LT2_U_VT_WRP2.16 | length 1621.4
  Top Layer w10: LT2_U_VT_WRP2.16@9162.8,2886.81 9163,2851.34 v1(9163,2754) ; v1(10437,2590) 10466,2590 10496,2620 10496,2650 DUT1_U_DUT_HEADER1.12@10516.04,2650
  Bottom Layer w10: v1(9163,2754) 9229,2688 10359,2688 10378,2669 10378,2626 10401,2603 10424,2603 v1(10437,2590)
OVCC_B108: DUT1_U_DUT_HEADER1.13 LT2_U_VT_WRP2.15 | length 1499.8
  Top Layer w10: LT2_U_VT_WRP2.15@9137.2,2886.81 9137.2,2920 9150.2,2933 9500,2933 v1(9650.31,2782.69) ; v1(10429,2742) 10437,2750 DUT1_U_DUT_HEADER1.13@10516.04,2750
  Bottom Layer w10: v1(9650.31,2782.69) 10388.31,2782.69 v1(10429,2742)
OVCC_B109: DUT1_U_DUT_HEADER1.14 LT2_U_VT_WRP2.14 | length 1702.3
  Top Layer w10: LT2_U_VT_WRP2.14@9111.61,2886.81 9111.61,2948.61 v1(9121,2958) ; v1(10415.69,2800.69) 10465,2850 DUT1_U_DUT_HEADER1.14@10516.04,2850
  Bottom Layer w10: v1(9121,2958) 9106,2943 9106,2787.8 9111.8,2782 9609,2782 9640,2813 10403.37,2813 v1(10415.69,2800.69)
OVCC_B110: DUT1_U_DUT_HEADER1.15 LT2_U_VT_WRP2.13 | length 1582.9
  Top Layer w10: LT2_U_VT_WRP2.13@9086.02,2886.81 9086.02,2829.98 9101,2815 v1(9135,2815) ; v1(10380,2950) DUT1_U_DUT_HEADER1.15@10516.04,2950
  Bottom Layer w10: v1(9135,2815) 9311,2991 10339,2991 v1(10380,2950)
OVCC_B111: DUT1_U_DUT_HEADER1.16 LT2_U_VT_WRP2.12 | length 1552.9
  Top Layer w10: LT2_U_VT_WRP2.12@9060.43,2886.81 9060.43,2937.43 v1(9139,3016) ; v1(10403,3016) 10437,3050 DUT1_U_DUT_HEADER1.16@10516.04,3050
  Bottom Layer w10: v1(9139,3016) v1(10403,3016)
OVCC_B112: DUT1_U_DUT_HEADER1.25 LT1_U_VT_WRP1.20 | length 715.7
  Top Layer w10: LT1_U_VT_WRP1.20@9990.16,3636.81 9990.16,3610.31 10032.3,3568.17 10077.67,3568.17 10156.58,3489.26 10156.58,3120.42 10189,3088 10189,3050 DUT1_U_DUT_HEADER1.25@10208.96,3050
OVCC_B113: DUT1_U_DUT_HEADER1.26 LT1_U_VT_WRP1.18 | length 810.3
  Top Layer w10: LT1_U_VT_WRP1.18@9938.98,3636.81 9938.98,3579.61 10138.58,3380 10138.58,3112.96 10156.58,3094.96 10156.58,3017.31 10189,2984.9 10189,2950 DUT1_U_DUT_HEADER1.26@10208.96,2950
OVCC_B114: DUT1_U_DUT_HEADER1.27 LT1_U_VT_WRP1.17 | length 929.1
  Top Layer w10: LT1_U_VT_WRP1.17@9913.39,3636.81 9913.39,3601.99 9920,3595.38 9920,3548.6 10120.58,3348.02 10120.58,2956.42 10175,2902 10175,2850 DUT1_U_DUT_HEADER1.27@10208.96,2850
OVCC_B115: DUT1_U_DUT_HEADER1.28 LT1_U_VT_WRP1.16 | length 1047.3
  Top Layer w10: LT1_U_VT_WRP1.16@9887.8,3636.81 9887.8,3544.75 10102,3330.55 10102,2810 10162,2750 DUT1_U_DUT_HEADER1.28@10208.96,2750
OVCC_B116: DUT1_U_DUT_HEADER1.29 LT1_U_VT_WRP1.15 | length 1162
  Top Layer w10: LT1_U_VT_WRP1.15@9862.2,3636.81 9862.2,3540.86 9952,3451.07 9952,2853 10155,2650 DUT1_U_DUT_HEADER1.29@10208.96,2650
OVCC_B117: DUT1_U_DUT_HEADER1.30 LT1_U_VT_WRP1.14 | length 1293.2
  Top Layer w10: LT1_U_VT_WRP1.14@9836.61,3636.81 9836.61,3539.16 9928.08,3447.7 9928.08,2741.92 10120,2550 DUT1_U_DUT_HEADER1.30@10208.96,2550
OVCC_B118: DUT1_U_DUT_HEADER1.31 LT1_U_VT_WRP1.13 | length 1448.9
  Top Layer w10: LT1_U_VT_WRP1.13@9811.02,3636.81 9811.02,2681.98 10043,2450 DUT1_U_DUT_HEADER1.31@10208.96,2450
OVCC_B119: DUT1_U_DUT_HEADER1.32 LT1_U_VT_WRP1.12 | length 1545.4
  Top Layer w10: LT1_U_VT_WRP1.12@9785.43,3636.81 9785.43,2631.57 10067,2350 DUT1_U_DUT_HEADER1.32@10208.96,2350
OVCC_B120: DUT1_U_DUT_HEADER1.33 LT2_U_VT_WRP1.20 | length 2115.3
  Top Layer w10: DUT1_U_DUT_HEADER1.33@10208.96,2250 10252,2250 10263,2239 10263,2019 10250,2006 10182,2006 10105,1929 10105,1669 10102.58,1666.58 10102.58,1456.42 10143,1416 10143,911.9 10118,886.9 10118,476.84 10160,434.84 LT2_U_VT_WRP1.20@10261.81,434.84
OVCC_B121: DUT1_U_DUT_HEADER1.34 LT2_U_VT_WRP1.18 | length 2171.1
  Top Layer w10: DUT1_U_DUT_HEADER1.34@10208.96,2150 10166,2150 10155,2161 10155,2282 10157,2284 10281,2284 10290,2275 10290,1632 10325,1597 10325,511.02 10300,486.02 LT2_U_VT_WRP1.18@10261.81,486.02
OVCC_B122: DUT1_U_DUT_HEADER1.35 LT2_U_VT_WRP1.17 | length 1759.2
  Top Layer w10: v1(10107,926) 10107,1190 10069.31,1227.69 10069.31,1327.54 10087,1345.23 10087,1428 10084,1431 10084,1674.42 10087,1677.42 10087,1990 10147,2050 DUT1_U_DUT_HEADER1.35@10208.96,2050 ; v1(10146,551.61) 10186,511.61 LT2_U_VT_WRP1.17@10261.81,511.61
  Bottom Layer w10: v1(10107,926) 10146,887 v1(10146,551.61)
OVCC_B123: DUT1_U_DUT_HEADER1.36 LT2_U_VT_WRP1.16 | length 1569
  Top Layer w10: DUT1_U_DUT_HEADER1.36@10208.96,1950 10163,1950 10123,1910 10123,1641.42 10120.58,1639 10120.58,1474.42 10162,1433 10162,578.61 10203.41,537.2 LT2_U_VT_WRP1.16@10261.81,537.2
OVCC_B124: DUT1_U_DUT_HEADER1.37 LT2_U_VT_WRP1.15 | length 1413.5
  Top Layer w10: DUT1_U_DUT_HEADER1.37@10208.96,1850 10172,1850 10141,1819 10141,1623 10138.58,1620.58 10138.58,1499.31 10180,1457.9 10180,602.8 10220,562.8 LT2_U_VT_WRP1.15@10261.81,562.8
OVCC_B125: DUT1_U_DUT_HEADER1.38 LT2_U_VT_WRP1.14 | length 1267.6
  Top Layer w10: DUT1_U_DUT_HEADER1.38@10208.96,1750 10255,1750 10268.98,1736.02 10268.98,1575.02 10307,1537 10307,600 10295.39,588.39 LT2_U_VT_WRP1.14@10261.81,588.39
OVCC_B126: DUT1_U_DUT_HEADER1.39 LT2_U_VT_WRP1.13 | length 1142.2
  Top Layer w10: DUT1_U_DUT_HEADER1.39@10208.96,1650 10177,1650 10160,1633 10160,1606 10156.58,1602.58 10156.58,1517.31 10198,1475.9 10198,640 10224.02,613.98 LT2_U_VT_WRP1.13@10261.81,613.98
OVCC_B127: DUT1_U_DUT_HEADER1.40 LT2_U_VT_WRP1.12 | length 957.2
  Top Layer w10: DUT1_U_DUT_HEADER1.40@10208.96,1550 10217,1550 10217,650 10227.43,639.57 LT2_U_VT_WRP1.12@10261.81,639.57
POS7V_U_Power_Control1: D1_U_Power_Control1.2 LM1_U_Power_Control1.5 LM2_U_Power_Control1.3 LM2_U_Power_Control1.4 VR1_U_Power_Control1.3 | length 2403.6
  Top Layer w10: LM2_U_Power_Control1.3@3955.71,3362.6 LM2_U_Power_Control1.4@4044.29,3362.6 LM1_U_Power_Control1.5@4044.29,3037.4 4749.6,3037.4 5011,2776 5011,2612.45 5000,2601.45 ; VR1_U_Power_Control1.3@4720.83,2601.45 5000,2601.45 ; D1_U_Power_Control1.2@5350,2344.09 5092.65,2601.45 5000,2601.45
POS7V_U_Power_Control2: D1_U_Power_Control2.2 LM1_U_Power_Control2.5 LM2_U_Power_Control2.3 LM2_U_Power_Control2.4 VR1_U_Power_Control2.3 | length 2778.2
  Top Layer w10: LM2_U_Power_Control2.3@3955.71,1587.6 LM2_U_Power_Control2.4@4044.29,1587.6 LM1_U_Power_Control2.5@4044.29,1262.4 4006,1262.4 v1(4006,1315) ; VR1_U_Power_Control2.3@4735.83,1334.45 4959.65,1334.45 D1_U_Power_Control2.2@5350,944.09
  Bottom Layer w10: v1(4006,1315) 4376.91,944.09 D1_U_Power_Control2.2@5350,944.09
RDY0: BBB_DOWN.15 POT_U_Power_Control2.14 | length 3415.9
  Top Layer w10: v1(2583,2697) 2583,2173 2732,2024 3398.77,2024 3448,2073.23 POT_U_Power_Control2.14@3486.81,2073.23
  Bottom Layer w10: BBB_DOWN.15@995.83,2900 953,2900 943,2890 943,2763 1059,2763 1183,2639 1492,2639 1558,2705 2575,2705 v1(2583,2697)
RDY1: BBB_DOWN.23 POT_U_Power_Control1.14 | length 2547.1
  Top Layer w10: v1(3415,2573.23) POT_U_Power_Control1.14@3486.81,2573.23
  Bottom Layer w10: BBB_DOWN.23@995.83,2500 995,2500 995,2520 1008,2533 3251,2533 3266,2518 3359.77,2518 v1(3415,2573.23)
SCLK_W_U_Power_Control1: POT_U_Power_Control1.11
SCLK_W_U_Power_Control2: BBB_DOWN.22 POT_U_Power_Control2.11 | length 2745.9
  Top Layer w10: v1(3107,2649) 3200,2556 3200,2127 3240,2087 3318,2087 3381,2150 POT_U_Power_Control2.11@3486.81,2150
  Bottom Layer w10: BBB_DOWN.22@1302.91,2600 1501,2600 1588,2687 2237,2687 2275,2649 v1(3107,2649)
SDO_W_U_Power_Control1: 10k_U_Power_Control1.1 BBB_DOWN.30 POT_U_Power_Control1.13 | length 3008.5
  Top Layer w10: v1(2797,2200) 2797,2548 3072,2823 3294.6,2823 3333,2784.6 3333,2691.51 3325,2683.51 3325,2675 10k_U_Power_Control1.1@3280,2630 3311,2599 v1(3311,2565) ; v1(3389,2657) 3447.18,2598.82 POT_U_Power_Control1.13@3486.81,2598.82
  Bottom Layer w10: BBB_DOWN.30@1302.91,2200 v1(2797,2200) ; v1(3311,2565) 3389,2643 v1(3389,2657)
SDO_W_U_Power_Control2: 10k_U_Power_Control2.1 BBB_DOWN.18 POT_U_Power_Control2.13 | length 4056.5
  Top Layer w10: 10k_U_Power_Control2.1@3280,2125 3223,2182 3223,2720 3182,2761 ; v1(3290,2782) 3290,2780 3294,2776 3279,2761 3182,2761 ; POT_U_Power_Control2.13@3486.81,2098.82 3408.04,2098.82 3359.22,2050 3117,2050 3078,2089 3078,2720 3119,2761 3182,2761
  Bottom Layer w10: BBB_DOWN.18@1302.91,2800 1669.43,2800 1714.43,2845 2129.95,2845 2150.95,2824 2396.05,2824 2417.05,2845 3240,2845 3290,2795 v1(3290,2782)
SPI1CLK: BBB_DOWN.31
SPICS0: BBB_DOWN.17 POT_U_Power_Control2.12 | length 3274.5
  Top Layer w10: v1(3112,2594) 3112,2140 3184,2068 3345,2068 3401.41,2124.41 POT_U_Power_Control2.12@3486.81,2124.41
  Bottom Layer w10: BBB_DOWN.17@995.83,2800 1120,2800 1256,2664 1489,2664 1555,2730 1725,2730 1769,2774 1811,2774 1840,2745 3082,2745 3147,2680 3147,2629 v1(3112,2594)
SPICS1: BBB_DOWN.28 POT_U_Power_Control1.12 | length 2646.2
  Top Layer w10: v1(3463,2451) 3532,2520 3532,2612.41 3520,2624.41 POT_U_Power_Control1.12@3486.81,2624.41
  Bottom Layer w10: BBB_DOWN.28@1302.91,2300 1260,2300 1249,2311 1249,2440 1260,2451 v1(3463,2451)
V_RST: BBB_DOWN.12 POT_U_Power_Control1.1 POT_U_Power_Control2.1 | length 3802.4
  Top Layer w10: POT_U_Power_Control2.1@3713.19,2073.23 3919.99,2073.23 3925.22,2068 4004,2068 4056,2120 4056,2318 3800.77,2573.23 POT_U_Power_Control1.1@3733,2573.23 ; POT_U_Power_Control1.1@3713.19,2573.23 POT_U_Power_Control1.1@3733,2573.23 ; v1(3733,2508) POT_U_Power_Control1.1@3733,2573.23
  Bottom Layer w10: BBB_DOWN.12@1302.91,3100 1542,3100 1778,2864 2136.4,2864 2149.4,2851 2397.6,2851 2410.6,2864 3253,2864 3299,2910 3331,2910 v1(3733,2508)
VR_ADJ_U_Power_Control1: 1uF_2_U_Power_Control1.2 250Ohm_U_Power_Control1.1 D2_U_Power_Control1.1 POT_U_Power_Control1.3 VR1_U_Power_Control1.1 | length 3118.1
  Top Layer w10: POT_U_Power_Control1.3@3713.19,2624.41 v1(3960.41,2624.41) ; 1uF_2_U_Power_Control1.2@4385,2800 4553,2800 4570.45,2782.55 VR1_U_Power_Control1.1@4720.83,2782.55 VR1_U_Power_Control1.1@4763,2782.55 ; v1(4763,2941) VR1_U_Power_Control1.1@4763,2782.55 ; v1(4859,2782.55) VR1_U_Power_Control1.1@4763,2782.55 ; D2_U_Power_Control1.1@5350,3455.91 5520.91,3285 250Ohm_U_Power_Control1.1@5700,3285
  Bottom Layer w10: v1(3960.41,2624.41) 4277,2941 v1(4763,2941) ; v1(4859,2782.55) 4859,2964.91 D2_U_Power_Control1.1@5350,3455.91
VR_ADJ_U_Power_Control2: 1uF_2_U_Power_Control2.2 250Ohm_U_Power_Control2.1 D2_U_Power_Control2.1 POT_U_Power_Control2.3 VR1_U_Power_Control2.1 | length 3266.7
  Top Layer w10: POT_U_Power_Control2.3@3713.19,2124.41 3757,2124.41 3784.41,2097 v1(3953,2097) ; 1uF_2_U_Power_Control2.2@4385,1550 4419.45,1515.55 VR1_U_Power_Control2.1@4735.83,1515.55 4809.65,1515.55 D2_U_Power_Control2.1@5350,2055.91 5583.09,2055.91 250Ohm_U_Power_Control2.1@5700,1939
  Bottom Layer w10: v1(3953,2097) 5308.91,2097 D2_U_Power_Control2.1@5350,2055.91
pads on no net: 5V_INVERTER.1 5V_INVERTER.7 12V.H POT_U_Power_Control1.5 POT_U_Power_Control2.5

## Polygon pours and split planes (outlines as drawn)
GND on Bottom Layer "Bottom Layer - GND" (solid, remove dead copper, pour order 0): 0,0 0,5000 11000,5000 11000,0
3V3_W_U_Power_Control1 on Top Layer "Top Layer - 3V3" (solid, remove dead copper, pour order 2): 0,0 0,5000 11000,5000 11000,0

## Silkscreen, mask and mechanical layers (free items; w line width, h text height)
Top Overlay:
  lines w10: 4007,4274 4007,4324 4108,4324 4108,4275 ; 4110,4127 4110,4078 4211,4078 4211,4128 ; 4299,474 4299,524 4400,524 4400,475 ; 4402,327 4402,278 4503,278 4503,328
  text "0.1 uF | 0603" at 10450,4875 h100
  text "150uF" at 3130,4840 h60
  text "THIS SIDE NEAR NUMATO USB PORT" at 7588,4796 h60
  text "10uF" at 5366,4675 h60
  text "10uF" at 1505,4665 h60
  text "100nF" at 1850,4665 h60
  text "150uF" at 3435,4595 h60
  text "0.1uF" at 5366,4575 h60
  text "10uF" at 5366,4475 h60
  text "0.1uF" at 5366,4375 h60
  text "0.1 uF | 0603" at 5790,4338.98 h100
  text "5V" at 4141,4277 h60
  text "10uF" at 1505,4140 h60
  text "100nF" at 1825,4140 h60
  text "CUSTOM HIGH" at 4238,4073 h60
  text "0.1uF" at 2850,4015 h60 r270
  text "10uF" at 2950,4015 h60 r270
  text "0.1uF" at 3050,4015 h60 r270
  text "10uF" at 3150,4015 h60 r270
  text "5V" at 5006,3921 h60
  text "3V3" at 3865,3920 h60
  text "GND" at 5006,3556 h60
  text "THIS SIDE NEAR BBB ETHERNET PORT" at 1165,3430 h60
  text "LM321" at 4117,3378 h60
  text "5MOhm" at 3396,3298 h60 r90
  text "7MOhm" at 3611,3242 h60
  text "250 Ohm" at 5780,3226 h60
  text "1MOhm" at 3617,3103 h60
  text "D1N4001" at 5201,3069 h60 r90
  text "LM321" at 4115,2968 h60
  text "LM317" at 4703,2899 h60
  text "3MOhm" at 3398,2880 h60 r90
  text "1uF" at 4281,2665 h60
  text "1uF" at 3929,2578 h60
  text "10kOhm" at 3205,2505 h60 r90
  text "AD5293" at 3427,2446 h60
  text "1uF" at 4278,2399 h60
  text "D1N4001" at 5207,2377 h60 r90
  text "1uF" at 3931,2059 h60
  text "10kOhm" at 3205,2000 h60 r90
  text "AD5293" at 3422,1936 h60
  text "250 Ohm" at 5775,1879 h60
  text "D1N4001" at 5214,1672 h60 r90
  text "LM317" at 4718,1608 h60
  text "5MOhm" at 3394,1522 h60 r90
  text "LM321" at 3943,1478 h60
  text "7MOhm" at 3609,1466 h60
  text "1uF" at 4280,1428 h60
  text "1MOhm" at 3615,1327 h60
  text "1uF" at 4278,1144 h60
  text "3MOhm" at 3396,1104 h60 r90
  text "LM321" at 3941,1068 h60
  text "D1N4001" at 5216,1001 h60 r90
  text "GND" at 4967,789 h60
  text "0.1 uF | 0603" at 5790,591.02 h100
  text "CUSTOM LOW" at 4433,477 h60
  text "10kOhm" at 2584,325 h60
  text "GND" at 4530,273 h60
  text "Norman Gifford | BBB Board | University of Utah" at 2890,100 h75
  text "FPGA RESET" at 1737,84 h60
  text "0.1 uF | 0603" at 10410,80 h100
Mechanical 3:
  the board outline again, w10